# Altium PCB PixelClockPanel.PcbDoc
Units mm, origin at the board's own origin, x right, y up, seen from the top; angles counter-clockwise.
Board outline 202 x 58 mm, 2 copper layers (Component Side, Solder Side), stack 1.57 mm thick; 187 components, 89 nets, 621 pads, 175 vias.
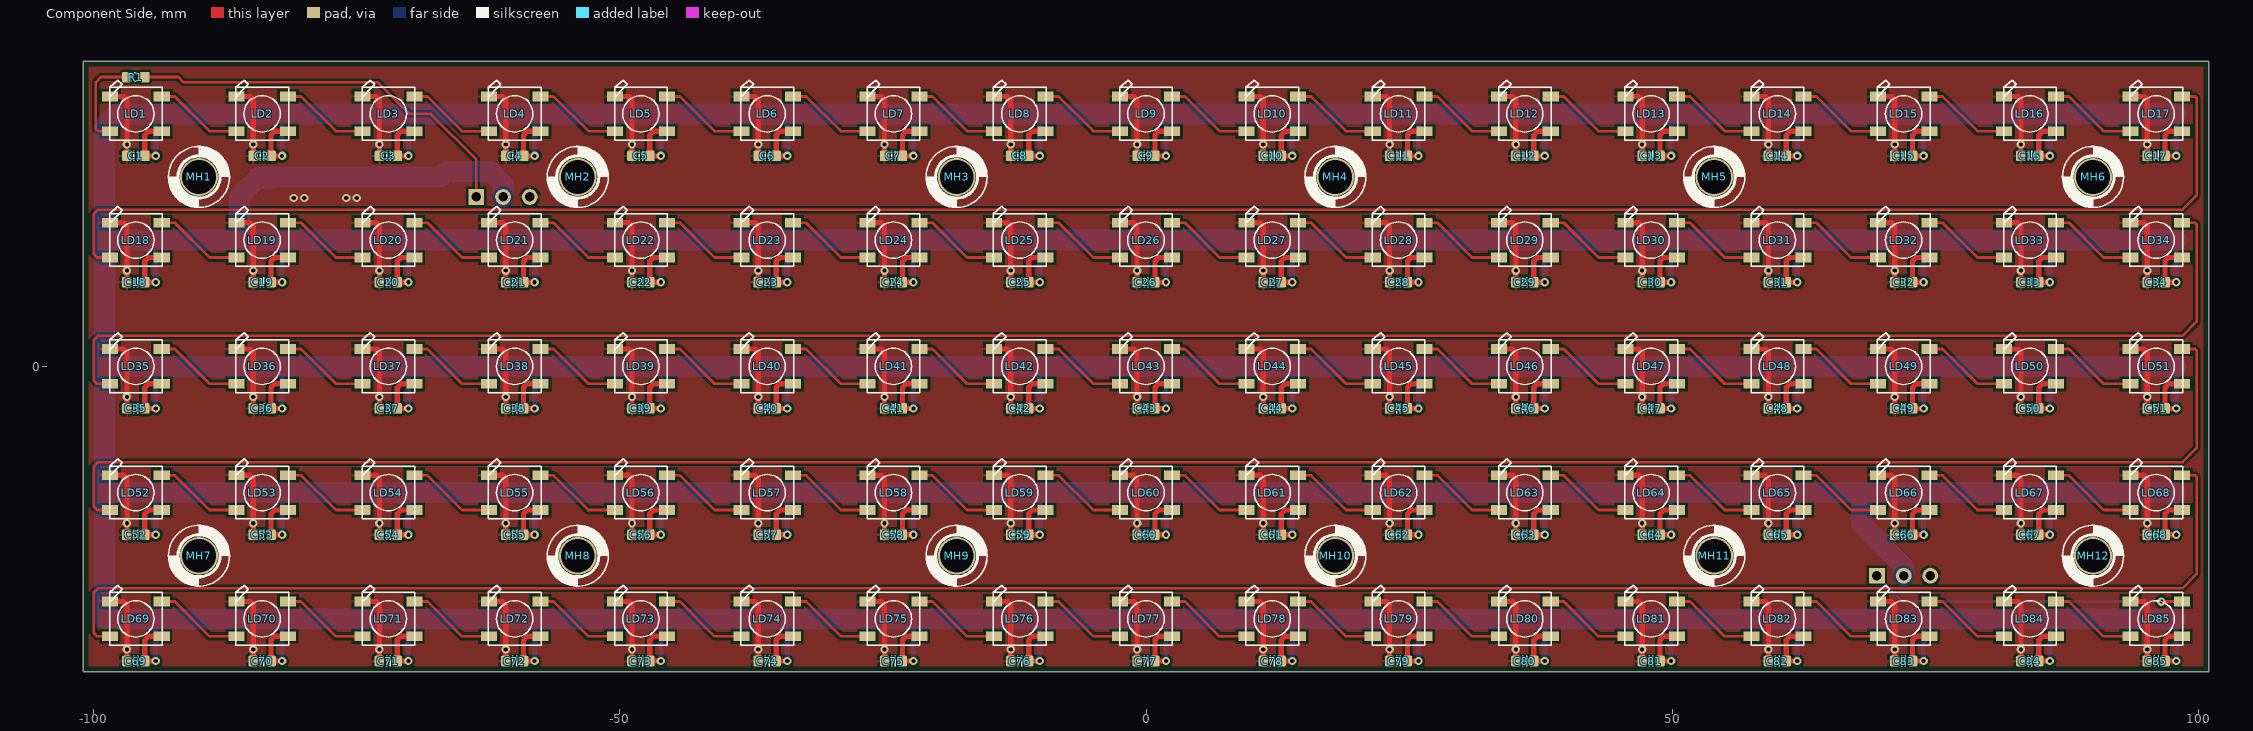
[diagram p0: Component Side view]
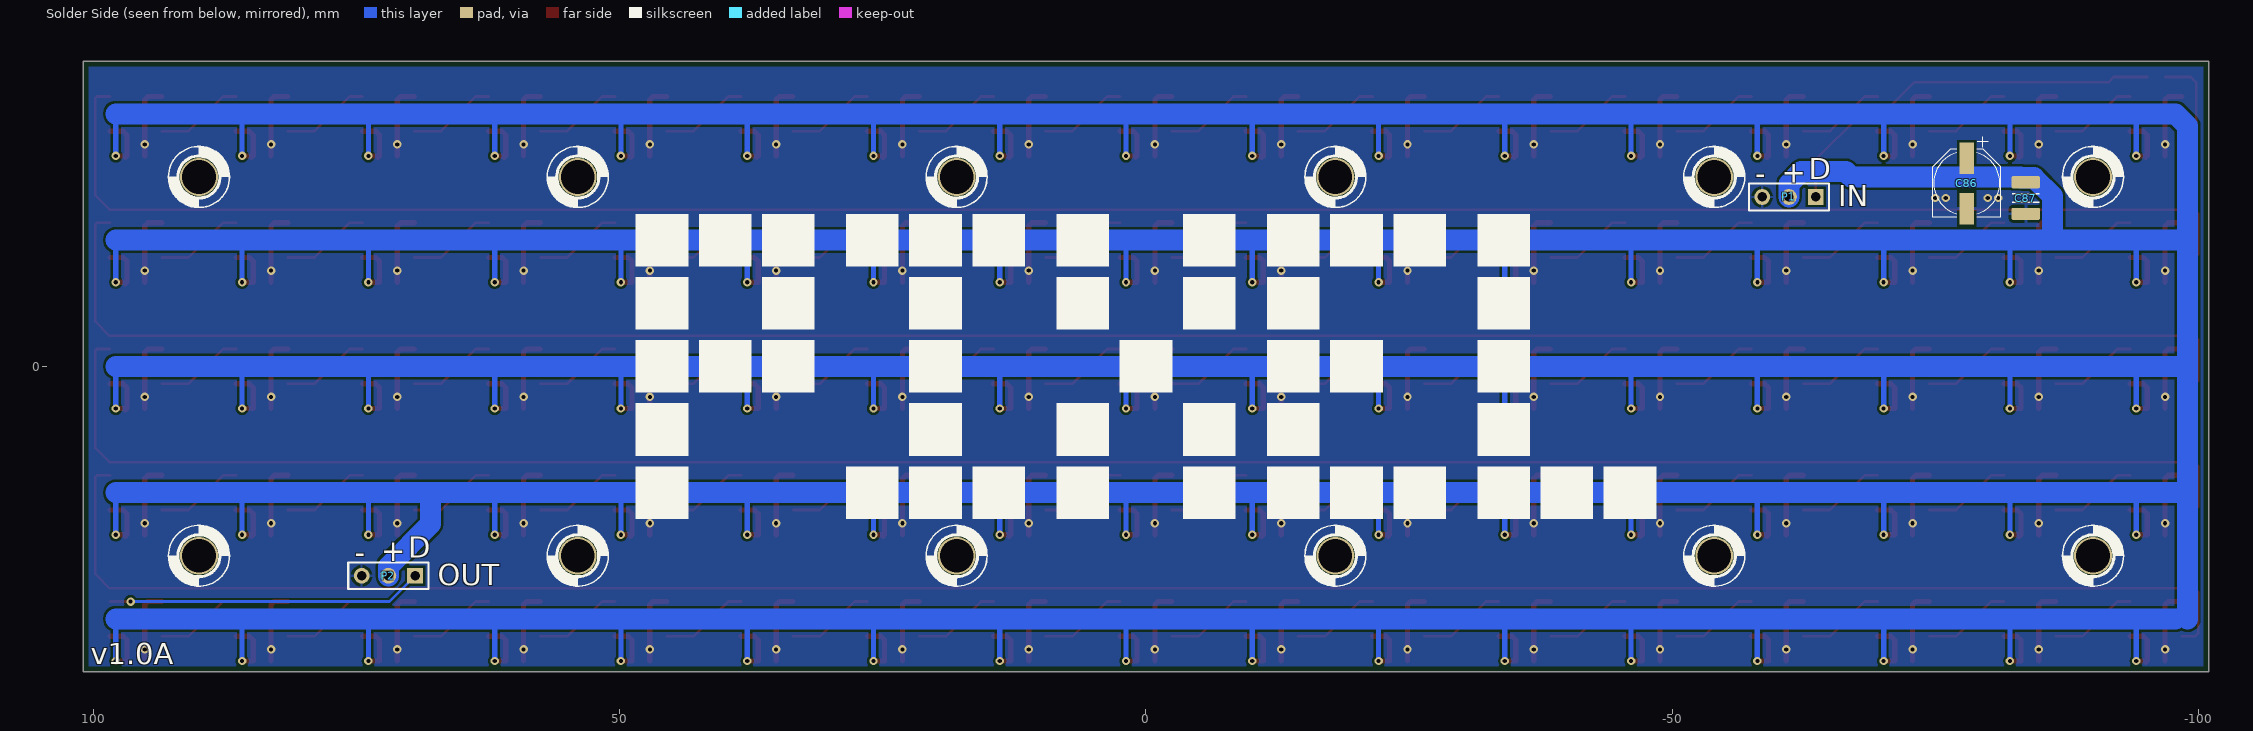
[diagram p1: Solder Side view, seen from below]
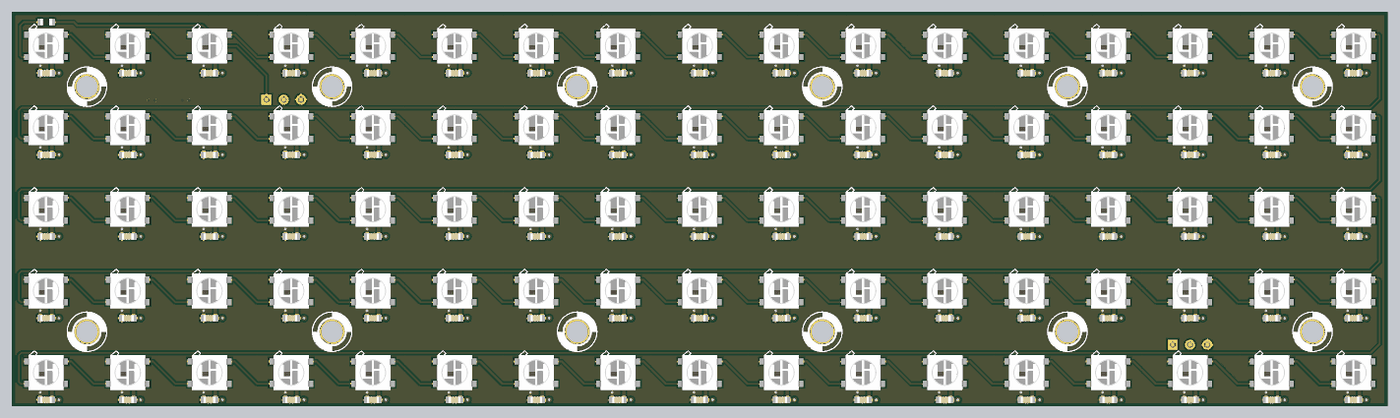
[diagram p2: 3D render of the assembled board from above, using the file's embedded part models]
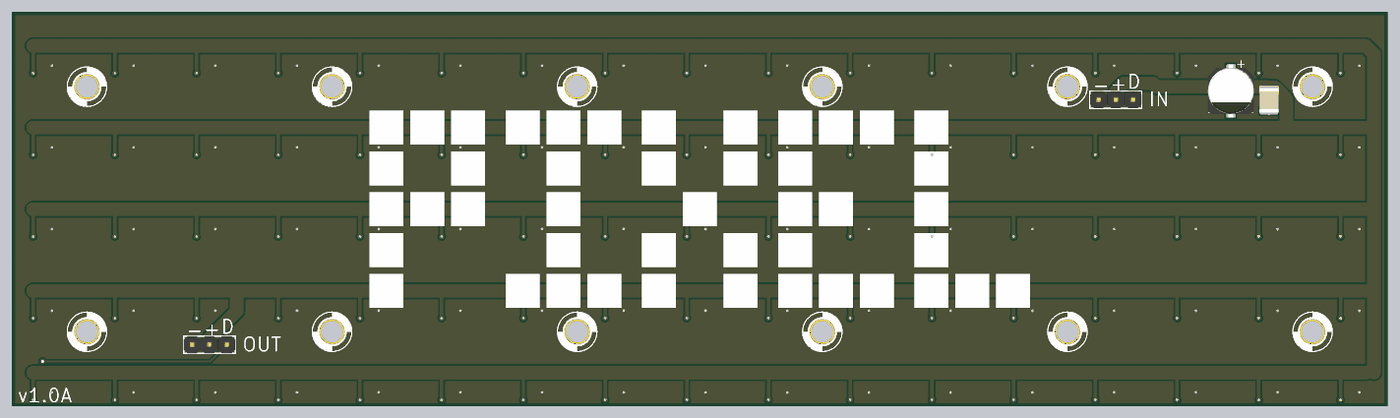
[diagram p3: 3D render of the assembled board from below, using the file's embedded part models]

## Layer stack, top to bottom
Top Solder: solder mask 0.0102, Solder Resist, Dk 3.5
Component Side: signal copper 0.035
Dielectric 3: prepreg 1.5, Dk 4.2
Solder Side: signal copper 0.035
Bottom Solder: solder mask 0.0102, Solder Resist, Dk 3.5

## Board outline
-101,-29 -101,29 101,29 101,-29

## Design rules (kind name [scope] priority, off if disabled: settings)
AssemblyTestPointUsage [All] p1 off:
AssemblyTestpoint [All] p1 off: testpointundercomponent=TRUE minsize=1.016 maxsize=2.54 preferedsize=1.524 minholesize=0 maxholesize=1.016 preferedholesize=0.813 testpointgrid=0.025 usegrid=TRUE gridtolerance=0 allowsidetop=TRUE allowsidebottom=TRUE
BoardOutlineClearance [All] p1: gap=0.254 ignorepadtopadclearanceinfootprint=FALSE except(0.5: Poly-OutlineEdge)
Clearance [All] p1: gap=0.25 ignorepadtopadclearanceinfootprint=FALSE except(0.2: Arc-SMDPad Track-SMDPad SMDPad-SMDPad)
ComponentClearance [All] p1: gap=0.2 collisioncheckmode=3 verticalgap=0.25 showdistances=FALSE
DiffPairsRouting [All] p1: maxlimit=1 minlimit=0.254 mostfreqgap=0.254 toplayer_minwidth=0.2 toplayer_maxwidth=0.4 toplayer_prefwidth=0.254 bottomlayer_minwidth=0.2 bottomlayer_maxwidth=0.4 bottomlayer_prefwidth=0.254 maxuncoupledlength=12.7
FabricationTestPointUsage [All] p1 off: valid=0 allowmultiple=FALSE
FabricationTestpoint [All] p1 off: side=3 testpointundercomponent=TRUE minsize=1.016 maxsize=2.54 preferedsize=1.524 minholesize=0 maxholesize=1.016 preferedholesize=0.813 testpointgrid=0.025 allowsidetop=TRUE allowsidebottom=TRUE usegrid=TRUE gridtolerance=0
HoleSize [All] p1: absolutevalues=TRUE maxlimit=4 minlimit=0.025 maxpercent=80.000 minpercent=20.000
MinimumSolderMaskSliver [All] p1: minsoldermaskwidth=0
NetAntennae [All] p1 off: netantennaetolerance=0
PolygonConnect PolygonConnect_Via [All vs IsVia] p1: connectstyle=Direct reliefconductorwidth=0.254 reliefentries=4 polygonreliefangle="90 Angle" airgapwidth=0.254
PolygonConnect [All] p2: connectstyle=Relief reliefconductorwidth=0.254 reliefentries=4 polygonreliefangle="90 Angle" airgapwidth=0.254
RoutingVias [All] p1: holewidth=0.4 width=0.8 viastyle="Through Hole" minholewidth=0.35 minwidth=0.7 maxholewidth=1 maxwidth=1.5
SilkToSilkClearance [All] p1: silktosilkclearance=0.1
SilkToSolderMaskClearance SilkscreenOverComponentPads [IsPad] p1: minsilkscreentomaskgap=0 clearancetoexposedcopper=TRUE
SolderMaskExpansion [All] p1: expansion=0.102 istentingtop=FALSE
Width Width_1 [All] p1: maxlimit=3 minlimit=0.2 preferedwidth=0.254 minimp=50.000000 maximp=50.000000 favimp=50.000000
19 further rules are at their usual default settings.

## Components (designator, comment, footprint, x,y, rotation, side; value= is the part's Value field where it differs from the comment)
C1 "Capacitor" CAPC1608X90N -96,20 r0 top value=0.1µF
C2 "Capacitor" CAPC1608X90N -84,20 r0 top value=0.1µF
C3 "Capacitor" CAPC1608X90N -72,20 r0 top value=0.1µF
C4 "Capacitor" CAPC1608X90N -60,20 r0 top value=0.1µF
C5 "Capacitor" CAPC1608X90N -48,20 r0 top value=0.1µF
C6 "Capacitor" CAPC1608X90N -36,20 r0 top value=0.1µF
C7 "Capacitor" CAPC1608X90N -24,20 r0 top value=0.1µF
C8 "Capacitor" CAPC1608X90N -12,20 r0 top value=0.1µF
C9 "Capacitor" CAPC1608X90N 0,20 r0 top value=0.1µF
C10 "Capacitor" CAPC1608X90N 12,20 r0 top value=0.1µF
C11 "Capacitor" CAPC1608X90N 24,20 r0 top value=0.1µF
C12 "Capacitor" CAPC1608X90N 36,20 r0 top value=0.1µF
C13 "Capacitor" CAPC1608X90N 48,20 r0 top value=0.1µF
C14 "Capacitor" CAPC1608X90N 60,20 r0 top value=0.1µF
C15 "Capacitor" CAPC1608X90N 72,20 r0 top value=0.1µF
C16 "Capacitor" CAPC1608X90N 84,20 r0 top value=0.1µF
C17 "Capacitor" CAPC1608X90N 96,20 r0 top value=0.1µF
C18 "Capacitor" CAPC1608X90N -96,8 r0 top value=0.1µF
C19 "Capacitor" CAPC1608X90N -84,8 r0 top value=0.1µF
C20 "Capacitor" CAPC1608X90N -72,8 r0 top value=0.1µF
C21 "Capacitor" CAPC1608X90N -60,8 r0 top value=0.1µF
C22 "Capacitor" CAPC1608X90N -48,8 r0 top value=0.1µF
C23 "Capacitor" CAPC1608X90N -36,8 r0 top value=0.1µF
C24 "Capacitor" CAPC1608X90N -24,8 r0 top value=0.1µF
C25 "Capacitor" CAPC1608X90N -12,8 r0 top value=0.1µF
C26 "Capacitor" CAPC1608X90N 0,8 r0 top value=0.1µF
C27 "Capacitor" CAPC1608X90N 12,8 r0 top value=0.1µF
C28 "Capacitor" CAPC1608X90N 24,8 r0 top value=0.1µF
C29 "Capacitor" CAPC1608X90N 36,8 r0 top value=0.1µF
C30 "Capacitor" CAPC1608X90N 48,8 r0 top value=0.1µF
C31 "Capacitor" CAPC1608X90N 60,8 r0 top value=0.1µF
C32 "Capacitor" CAPC1608X90N 72,8 r0 top value=0.1µF
C33 "Capacitor" CAPC1608X90N 84,8 r0 top value=0.1µF
C34 "Capacitor" CAPC1608X90N 96,8 r0 top value=0.1µF
C35 "Capacitor" CAPC1608X90N -96,-4 r0 top value=0.1µF
C36 "Capacitor" CAPC1608X90N -84,-4 r0 top value=0.1µF
C37 "Capacitor" CAPC1608X90N -72,-4 r0 top value=0.1µF
C38 "Capacitor" CAPC1608X90N -60,-4 r0 top value=0.1µF
C39 "Capacitor" CAPC1608X90N -48,-4 r0 top value=0.1µF
C40 "Capacitor" CAPC1608X90N -36,-4 r0 top value=0.1µF
C41 "Capacitor" CAPC1608X90N -24,-4 r0 top value=0.1µF
C42 "Capacitor" CAPC1608X90N -12,-4 r0 top value=0.1µF
C43 "Capacitor" CAPC1608X90N 0,-4 r0 top value=0.1µF
C44 "Capacitor" CAPC1608X90N 12,-4 r0 top value=0.1µF
C45 "Capacitor" CAPC1608X90N 24,-4 r0 top value=0.1µF
C46 "Capacitor" CAPC1608X90N 36,-4 r0 top value=0.1µF
C47 "Capacitor" CAPC1608X90N 48,-4 r0 top value=0.1µF
C48 "Capacitor" CAPC1608X90N 60,-4 r0 top value=0.1µF
C49 "Capacitor" CAPC1608X90N 72,-4 r0 top value=0.1µF
C50 "Capacitor" CAPC1608X90N 84,-4 r0 top value=0.1µF
C51 "Capacitor" CAPC1608X90N 96,-4 r0 top value=0.1µF
C52 "Capacitor" CAPC1608X90N -96,-16 r0 top value=0.1µF
C53 "Capacitor" CAPC1608X90N -84,-16 r0 top value=0.1µF
C54 "Capacitor" CAPC1608X90N -72,-16 r0 top value=0.1µF
C55 "Capacitor" CAPC1608X90N -60,-16 r0 top value=0.1µF
C56 "Capacitor" CAPC1608X90N -48,-16 r0 top value=0.1µF
C57 "Capacitor" CAPC1608X90N -36,-16 r0 top value=0.1µF
C58 "Capacitor" CAPC1608X90N -24,-16 r0 top value=0.1µF
C59 "Capacitor" CAPC1608X90N -12,-16 r0 top value=0.1µF
C60 "Capacitor" CAPC1608X90N 0,-16 r0 top value=0.1µF
C61 "Capacitor" CAPC1608X90N 12,-16 r0 top value=0.1µF
C62 "Capacitor" CAPC1608X90N 24,-16 r0 top value=0.1µF
C63 "Capacitor" CAPC1608X90N 36,-16 r0 top value=0.1µF
C64 "Capacitor" CAPC1608X90N 48,-16 r0 top value=0.1µF
C65 "Capacitor" CAPC1608X90N 60,-16 r0 top value=0.1µF
C66 "Capacitor" CAPC1608X90N 72,-16 r0 top value=0.1µF
C67 "Capacitor" CAPC1608X90N 84,-16 r0 top value=0.1µF
C68 "Capacitor" CAPC1608X90N 96,-16 r0 top value=0.1µF
C69 "Capacitor" CAPC1608X90N -96,-28 r0 top value=0.1µF
C70 "Capacitor" CAPC1608X90N -84,-28 r0 top value=0.1µF
C71 "Capacitor" CAPC1608X90N -72,-28 r0 top value=0.1µF
C72 "Capacitor" CAPC1608X90N -60,-28 r0 top value=0.1µF
C73 "Capacitor" CAPC1608X90N -48,-28 r0 top value=0.1µF
C74 "Capacitor" CAPC1608X90N -36,-28 r0 top value=0.1µF
C75 "Capacitor" CAPC1608X90N -24,-28 r0 top value=0.1µF
C76 "Capacitor" CAPC1608X90N -12,-28 r0 top value=0.1µF
C77 "Capacitor" CAPC1608X90N 0,-28 r0 top value=0.1µF
C78 "Capacitor" CAPC1608X90N 12,-28 r0 top value=0.1µF
C79 "Capacitor" CAPC1608X90N 24,-28 r0 top value=0.1µF
C80 "Capacitor" CAPC1608X90N 36,-28 r0 top value=0.1µF
C81 "Capacitor" CAPC1608X90N 48,-28 r0 top value=0.1µF
C82 "Capacitor" CAPC1608X90N 60,-28 r0 top value=0.1µF
C83 "Capacitor" CAPC1608X90N 72,-28 r0 top value=0.1µF
C84 "Capacitor" CAPC1608X90N 84,-28 r0 top value=0.1µF
C85 "Capacitor" CAPC1608X90N 96,-28 r0 top value=0.1µF
C86 "CapE-6.3-100uF-16V" "CAP EL PANASONIC" -78,14.95 r180 bottom value="100uF 16V"
C87 "CapC-1210-22uF-16V" "CAP 3225-1210" -83.6,16 r90 bottom value=22uF
LD1 "SK6812" WS2812B -96,24 r0 top
LD2 "SK6812" WS2812B -84,24 r0 top
LD3 "SK6812" WS2812B -72,24 r0 top
LD4 "SK6812" WS2812B -60,24 r0 top
LD5 "SK6812" WS2812B -48,24 r0 top
LD6 "SK6812" WS2812B -36,24 r0 top
LD7 "SK6812" WS2812B -24,24 r0 top
LD8 "SK6812" WS2812B -12,24 r0 top
LD9 "SK6812" WS2812B 0,24 r0 top
LD10 "SK6812" WS2812B 12,24 r0 top
LD11 "SK6812" WS2812B 24,24 r0 top
LD12 "SK6812" WS2812B 36,24 r0 top
LD13 "SK6812" WS2812B 48,24 r0 top
LD14 "SK6812" WS2812B 60,24 r0 top
LD15 "SK6812" WS2812B 72,24 r0 top
LD16 "SK6812" WS2812B 84,24 r0 top
LD17 "SK6812" WS2812B 96,24 r0 top
LD18 "SK6812" WS2812B -96,12 r0 top
LD19 "SK6812" WS2812B -84,12 r0 top
LD20 "SK6812" WS2812B -72,12 r0 top
LD21 "SK6812" WS2812B -60,12 r0 top
LD22 "SK6812" WS2812B -48,12 r0 top
LD23 "SK6812" WS2812B -36,12 r0 top
LD24 "SK6812" WS2812B -24,12 r0 top
LD25 "SK6812" WS2812B -12,12 r0 top
LD26 "SK6812" WS2812B 0,12 r0 top
LD27 "SK6812" WS2812B 12,12 r0 top
LD28 "SK6812" WS2812B 24,12 r0 top
LD29 "SK6812" WS2812B 36,12 r0 top
LD30 "SK6812" WS2812B 48,12 r0 top
LD31 "SK6812" WS2812B 60,12 r0 top
LD32 "SK6812" WS2812B 72,12 r0 top
LD33 "SK6812" WS2812B 84,12 r0 top
LD34 "SK6812" WS2812B 96,12 r0 top
LD35 "SK6812" WS2812B -96,0 r0 top
LD36 "SK6812" WS2812B -84,0 r0 top
LD37 "SK6812" WS2812B -72,0 r0 top
LD38 "SK6812" WS2812B -60,0 r0 top
LD39 "SK6812" WS2812B -48,0 r0 top
LD40 "SK6812" WS2812B -36,0 r0 top
LD41 "SK6812" WS2812B -24,0 r0 top
LD42 "SK6812" WS2812B -12,0 r0 top
LD43 "SK6812" WS2812B 0,0 r0 top
LD44 "SK6812" WS2812B 12,0 r0 top
LD45 "SK6812" WS2812B 24,0 r0 top
LD46 "SK6812" WS2812B 36,0 r0 top
LD47 "SK6812" WS2812B 48,0 r0 top
LD48 "SK6812" WS2812B 60,0 r0 top
LD49 "SK6812" WS2812B 72,0 r0 top
LD50 "SK6812" WS2812B 84,0 r0 top
LD51 "SK6812" WS2812B 96,0 r0 top
LD52 "SK6812" WS2812B -96,-12 r0 top
LD53 "SK6812" WS2812B -84,-12 r0 top
LD54 "SK6812" WS2812B -72,-12 r0 top
LD55 "SK6812" WS2812B -60,-12 r0 top
LD56 "SK6812" WS2812B -48,-12 r0 top
LD57 "SK6812" WS2812B -36,-12 r0 top
LD58 "SK6812" WS2812B -24,-12 r0 top
LD59 "SK6812" WS2812B -12,-12 r0 top
LD60 "SK6812" WS2812B 0,-12 r0 top
LD61 "SK6812" WS2812B 12,-12 r0 top
LD62 "SK6812" WS2812B 24,-12 r0 top
LD63 "SK6812" WS2812B 36,-12 r0 top
LD64 "SK6812" WS2812B 48,-12 r0 top
LD65 "SK6812" WS2812B 60,-12 r0 top
LD66 "SK6812" WS2812B 72,-12 r0 top
LD67 "SK6812" WS2812B 84,-12 r0 top
LD68 "SK6812" WS2812B 96,-12 r0 top
LD69 "SK6812" WS2812B -96,-24 r0 top
LD70 "SK6812" WS2812B -84,-24 r0 top
LD71 "SK6812" WS2812B -72,-24 r0 top
LD72 "SK6812" WS2812B -60,-24 r0 top
LD73 "SK6812" WS2812B -48,-24 r0 top
LD74 "SK6812" WS2812B -36,-24 r0 top
LD75 "SK6812" WS2812B -24,-24 r0 top
LD76 "SK6812" WS2812B -12,-24 r0 top
LD77 "SK6812" WS2812B 0,-24 r0 top
LD78 "SK6812" WS2812B 12,-24 r0 top
LD79 "SK6812" WS2812B 24,-24 r0 top
LD80 "SK6812" WS2812B 36,-24 r0 top
LD81 "SK6812" WS2812B 48,-24 r0 top
LD82 "SK6812" WS2812B 60,-24 r0 top
LD83 "SK6812" WS2812B 72,-24 r0 top
LD84 "SK6812" WS2812B 84,-24 r0 top
LD85 "SK6812" WS2812B 96,-24 r0 top
MH1 "Screw Hole" M3-Hole-2 -90,18 r0 top
MH2 "Screw Hole" M3-Hole-2 -54,18 r0 top
MH3 "Screw Hole" M3-Hole-2 -18,18 r0 top
MH4 "Screw Hole" M3-Hole-2 18,18 r0 top
MH5 "Screw Hole" M3-Hole-2 54,18 r0 top
MH6 "Screw Hole" M3-Hole-2 90,18 r0 top
MH7 "Screw Hole" M3-Hole-2 -90,-18 r0 top
MH8 "Screw Hole" M3-Hole-2 -54,-18 r0 top
MH9 "Screw Hole" M3-Hole-2 -18,-18 r0 top
MH10 "Screw Hole" M3-Hole-2 18,-18 r0 top
MH11 "Screw Hole" M3-Hole-2 54,-18 r0 top
MH12 "Screw Hole" M3-Hole-2 90,-18 r0 top
P1 "Header 3" HDR1X3-HEADER -63.64,16.1 r0 bottom
P2 "Header 3" HDR1X3-HEADER 69.46,-19.9 r0 bottom
R1 "Resistor" "RES 1608-0603" -96,27.5 r180 top value=470R

## Footprints (in the part's own frame and the unit in brackets; to place one, negate y for a bottom-side part, rotate by r counter-clockwise, add the part's x,y. Pads: shape width x height; smd on the part's side, far side on the other; paste and mask are expansions set on the pad)
"CAP 3225-1210" [mm] "Chip Capacitor, Body 3.2x2.5mm, EIA 1210, IPC Medium Density"
  round 0.508 on Mech15: 0(0,0)
  rrect25% 1.15x2.7 smd: 1(-1.5,0) 2(1.5,0)
  silkscreen extent -0.4,-1.3 0.4,1.3, body extent -1.8,-1.4 1.8,1.4, height 2.19
"CAP EL PANASONIC" [mil]
  rect 55x118 smd: 1(0,190.97) 2(0,1.97)
  silkscreen extent -128,-31 127,271, body extent -134,-57 134,250, height 217
CAPC1608X90N [mm] "Chip Capacitor, Body 1.6x0.8mm, EIA 0603, IPC Medium Density"
  round 0.254 on Mech15: 0(0,0)
  rrect25% 0.9x1 smd: 1(-0.85,0) 2(0.85,0)
  Component Side pour cut-out: -0.6,0.5 -0.4,0.7 0.4,0.7 0.6,0.5 0.6,-0.5 0.4,-0.7 -0.4,-0.7 -0.6,-0.5
  silkscreen extent -0.18,-0.48 0.18,0.48, body extent -0.85,-0.45 0.85,0.45, height 0.89
HDR1X3-HEADER [mm]
  rect 1.5x1.5 hole 0.9: 1(0,0)
  round 1.5 hole 0.9: 2(2.54,0) 3(5.08,0)
  silkscreen extent -1.27,-1.27 6.35,1.27, body extent -1.27,-1.27 6.35,1.27, height 8.6
M3-Hole-2 [mm]
  round 3.6 hole 3.2: M3(0,0)
  silkscreen extent -2.9,-2.93 2.9,2.93
"RES 1608-0603" [mm]
  round 0.254 on Mech15: 0(0,0)
  rrect25% 0.9x1 smd: 1(-0.85,0) 2(0.85,0)
  Component Side pour cut-out: -0.6,0.5 -0.4,0.7 0.4,0.7 0.6,0.5 0.6,-0.5 0.4,-0.7 -0.4,-0.7 -0.6,-0.5
  silkscreen extent -0.15,-0.41 0.15,0.41, body extent -0.87,-0.47 0.88,0.48, height 0.54
WS2812B [mil]
  rect 60x36 smd: 1(97,-64.96) 2(97,65) 3(-96.46,65) 4(-96.46,-64.96)
  silkscreen extent -98,-98 99,126, body extent -105,-97 105,97, height 59

## Part data
C1 C2 C3 C4 C5 C6 C7 C8 C9 C10 C11 C12 C13 C14 C15 C16 C17 C18 C19 C20 C21 C22 C23 C24 C25 C26 C27 C28 C29 C30 C31 C32 C33 C34 C35 C36 C37 C38 C39 C40 C41 C42 C43 C44 C45 C46 C47 C48 C49 C50 C51 C52 C53 C54 C55 C56 C57 C58 C59 C60 C61 C62 C63 C64 C65 C66 C67 C68 C69 C70 C71 C72 C73 C74 C75 C76 C77 C78 C79 C80 C81 C82 C83 C84 C85: library part UMJ107BB7104KAHT, "CAP CER 0.1UF 50V X7R 0603", Manufacturer 1="Taiyo Yuden", Operating Temperature="-55°C ~ 125°C", Package=0402, Package / Case="0603 (1608 Metric)", Supplier Part Number 1=587-4474-1-ND, Temperature Coefficient=X7R, TOLERANCE=±10%, Voltage=50V, Manufacturer Part Number 1=UMJ107BB7104KAHT, Note="Approved sub OK", Revision="July-2002: Re-released for DXP Platform.", Size / Dimension="0.063\" L x 0.031\" W (1.60mm x 0.80mm)", Supplier 1=Digi-Key, Thickness (Max)="0.039\" (1.00mm)", Type=X5R
C86: "Polarized Capacitor (Surface Mount)", Supplier Part Number 1=565-2204-1-ND, Note="Approved sub OK", Published=8-Jun-2000, Publisher="Altium Limited", Revision="July-2002: Re-released for DXP Platform.", Supplier 1=Digi-Key
C87: "CAP CER 22UF 16V X7R 1210", Package=1210, Supplier Part Number 1=587-2784-1-ND, TOLERANCE=10%, Voltage=25V, Note="Approved sub OK", Revision="July-2002: Re-released for DXP Platform.", Supplier 1=Digi-Key, Type=X7R
LD1 LD2 LD3 LD4 LD5 LD6 LD7 LD8 LD9 LD10 LD11 LD12 LD13 LD14 LD15 LD16 LD17 LD18 LD19 LD20 LD21 LD22 LD23 LD24 LD25 LD26 LD27 LD28 LD29 LD30 LD31 LD32 LD33 LD34 LD35 LD36 LD37 LD38 LD39 LD40 LD41 LD42 LD43 LD44 LD45 LD46 LD47 LD48 LD49 LD50 LD51 LD52 LD53 LD54 LD55 LD56 LD57 LD58 LD59 LD60 LD61 LD62 LD63 LD64 LD65 LD66 LD67 LD68 LD69 LD70 LD71 LD72 LD73 LD74 LD75 LD76 LD77 LD78 LD79 LD80 LD81 LD82 LD83 LD84 LD85: library part "LED - SK6812"
P1 P2: library part "Header 1X3", "Header, 3-Pin", Manufacturer 1="Generic Header", Note="Approved sub OK"
R1: library part RC0603FR-07470RL, "RES SMD 470 OHM 1% 1/10W 0603", Manufacturer 1=Yageo, Operating Temperature="-55°C ~ 155°C", Package / Case="0603 (1608 Metric)", Power (Watts)="0.1W, 1/10W", Supplier Part Number 1=311-470HRCT-ND, Temperature Coefficient=±100ppm/°C, TOLERANCE=±1%, Composition="Thick Film", Features="Moisture Resistant", Height - Seated (Max)="0.022\" (0.55mm)", Manufacturer Part Number 1=RC0603FR-07470RL, Note="Approved sub OK", Published=8-Jun-2000, Publisher="Altium Limited", Revision="July-2002: Re-released for DXP Platform.", Size / Dimension="0.063\" L x 0.031\" W (1.60mm x 0.80mm)", Supplier 1=Digi-Key

## Via types
v1: diameter 0.8, hole 0.4, Component Side to Solder Side, tented both sides, 175 vias

## Nets (pads, with @x,y where several pads share a name; then routed paths per layer and width w, separated by ;. In a path a pad name is that pad's centre, name@x,y a point inside that pad or via, vN(x,y) a via of type N, cw(c..) or ccw(c..) an arc to the next point about the centre after c; other vN are vias at no path point)
+5V: C1.2 C2.2 C3.2 C4.2 C5.2 C6.2 C7.2 C8.2 C9.2 C10.2 C11.2 C12.2 C13.2 C14.2 C15.2 C16.2 C17.2 C18.2 C19.2 C20.2 C21.2 C22.2 C23.2 C24.2 C25.2 C26.2 C27.2 C28.2 C29.2 C30.2 C31.2 C32.2 C33.2 C34.2 C35.2 C36.2 C37.2 C38.2 C39.2 C40.2 C41.2 C42.2 C43.2 C44.2 C45.2 C46.2 C47.2 C48.2 C49.2 C50.2 C51.2 C52.2 C53.2 C54.2 C55.2 C56.2 C57.2 C58.2 C59.2 C60.2 C61.2 C62.2 C63.2 C64.2 C65.2 C66.2 C67.2 C68.2 C69.2 C70.2 C71.2 C72.2 C73.2 C74.2 C75.2 C76.2 C77.2 C78.2 C79.2 C80.2 C81.2 C82.2 C83.2 C84.2 C85.2 C86.1 C87.2 LD1.1 LD2.1 LD3.1 LD4.1 LD5.1 LD6.1 LD7.1 LD8.1 LD9.1 LD10.1 LD11.1 LD12.1 LD13.1 LD14.1 LD15.1 LD16.1 LD17.1 LD18.1 LD19.1 LD20.1 LD21.1 LD22.1 LD23.1 LD24.1 LD25.1 LD26.1 LD27.1 LD28.1 LD29.1 LD30.1 LD31.1 LD32.1 LD33.1 LD34.1 LD35.1 LD36.1 LD37.1 LD38.1 LD39.1 LD40.1 LD41.1 LD42.1 LD43.1 LD44.1 LD45.1 LD46.1 LD47.1 LD48.1 LD49.1 LD50.1 LD51.1 LD52.1 LD53.1 LD54.1 LD55.1 LD56.1 LD57.1 LD58.1 LD59.1 LD60.1 LD61.1 LD62.1 LD63.1 LD64.1 LD65.1 LD66.1 LD67.1 LD68.1 LD69.1 LD70.1 LD71.1 LD72.1 LD73.1 LD74.1 LD75.1 LD76.1 LD77.1 LD78.1 LD79.1 LD80.1 LD81.1 LD82.1 LD83.1 LD84.1 LD85.1 P1.2 P2.2 | length 1815.7
  Component Side w0.5: C69.2@-95,-28.15 C69.2 ; C1.2@-95,19.85 C1.2 ; v1(-94.1,-28) C69.2 ; v1(-94.1,-16) C52.2 -95.15,-14 -94.8,-13.65 LD52.1 ; v1(-94.1,-4) C35.2 -95.15,-2 -94.8,-1.65 LD35.1 ; v1(-94.1,8) C18.2 -95.15,10 -94.8,10.35 LD18.1 ; v1(-94.1,20) C1.2 ; LD69.1 -94.8,-25.65 -95.15,-26 C69.2 ; LD1.1 -94.8,22.35 -95.15,22 C1.2 ; C53.2@-83,-16.15 C53.2 ; C2.2@-83,19.85 C2.2 ; v1(-82.1,-28) C70.2 -83.15,-26 -82.8,-25.65 LD70.1 ; v1(-82.1,-16) C53.2 ; v1(-82.1,-4) C36.2 -83.15,-2 -82.8,-1.65 LD36.1 ; v1(-82.1,8) C19.2 -83.15,10 -82.8,10.35 LD19.1 ; v1(-82.1,20) C2.2 ; LD53.1 -82.8,-13.65 -83.15,-14 C53.2 ; LD2.1 -82.8,22.35 -83.15,22 C2.2 ; C3.2@-71,19.85 C3.2 ; v1(-70.1,-28) C71.2 -71.15,-26 -70.8,-25.65 LD71.1 ; v1(-70.1,-16) C54.2 -71.15,-14 -70.8,-13.65 LD54.1 ; v1(-70.1,-4) C37.2 -71.15,-2 -70.8,-1.65 LD37.1 ; v1(-70.1,8) C20.2 -71.15,10 -70.8,10.35 LD20.1 ; v1(-70.1,20) C3.2 ; LD3.1 -70.8,22.35 -71.15,22 C3.2 ; C55.2@-59,-16.15 C55.2 ; C4.2@-59,19.85 C4.2 ; v1(-58.1,-28) C72.2 -59.15,-26 -58.8,-25.65 LD72.1 ; v1(-58.1,-16) C55.2 ; v1(-58.1,-4) C38.2 -59.15,-2 -58.8,-1.65 LD38.1 ; v1(-58.1,8) C21.2 -59.15,10 -58.8,10.35 LD21.1 ; v1(-58.1,20) C4.2 ; LD55.1 -58.8,-13.65 -59.15,-14 C55.2 ; LD4.1 -58.8,22.35 -59.15,22 C4.2 ; C56.2@-47,-16.15 C56.2 ; C5.2@-47,19.85 C5.2 ; v1(-46.1,-28) C73.2 -47.15,-26 -46.8,-25.65 LD73.1 ; v1(-46.1,-16) C56.2 ; v1(-46.1,-4) C39.2 -47.15,-2 -46.8,-1.65 LD39.1 ; v1(-46.1,8) C22.2 -47.15,10 -46.8,10.35 LD22.1 ; v1(-46.1,20) C5.2 ; LD56.1 -46.8,-13.65 -47.15,-14 C56.2 ; LD5.1 -46.8,22.35 -47.15,22 C5.2 ; C6.2@-35,19.85 C6.2 ; v1(-34.1,-28) C74.2 -35.15,-26 -34.8,-25.65 LD74.1 ; v1(-34.1,-16) C57.2 -35.15,-14 -34.8,-13.65 LD57.1 ; v1(-34.1,-4) C40.2 -35.15,-2 -34.8,-1.65 LD40.1 ; v1(-34.1,8) C23.2 -35.15,10 -34.8,10.35 LD23.1 ; v1(-34.1,20) C6.2 ; LD6.1 -34.8,22.35 -35.15,22 C6.2 ; C58.2@-23,-16.15 C58.2 ; C7.2@-23,19.85 C7.2 ; v1(-22.1,-28) C75.2 -23.15,-26 -22.8,-25.65 LD75.1 ; v1(-22.1,-16) C58.2 ; v1(-22.1,-4) C41.2 -23.15,-2 -22.8,-1.65 LD41.1 ; v1(-22.1,8) C24.2 -23.15,10 -22.8,10.35 LD24.1 ; v1(-22.1,20) C7.2 ; LD58.1 -22.8,-13.65 -23.15,-14 C58.2 ; LD7.1 -22.8,22.35 -23.15,22 C7.2 ; C59.2@-11,-16.15 C59.2 ; C8.2@-11,19.85 C8.2 ; v1(-10.1,-28) C76.2 -11.15,-26 -10.8,-25.65 LD76.1 ; v1(-10.1,-16) C59.2 ; v1(-10.1,-4) C42.2 -11.15,-2 -10.8,-1.65 LD42.1 ; v1(-10.1,8) C25.2 -11.15,10 -10.8,10.35 LD25.1 ; v1(-10.1,20) C8.2 ; LD59.1 -10.8,-13.65 -11.15,-14 C59.2 ; LD8.1 -10.8,22.35 -11.15,22 C8.2 ; C9.2@1,19.85 C9.2 ; v1(1.9,-28) C77.2 0.85,-26 1.2,-25.65 LD77.1 ; v1(1.9,-16) C60.2 0.85,-14 1.2,-13.65 LD60.1 ; v1(1.9,-4) C43.2 0.85,-2 1.2,-1.65 LD43.1 ; v1(1.9,8) C26.2 0.85,10 1.2,10.35 LD26.1 ; v1(1.9,20) C9.2 ; LD9.1 1.2,22.35 0.85,22 C9.2 ; C61.2@13,-16.15 C61.2 ; C10.2@13,19.85 C10.2 ; v1(13.9,-28) C78.2 12.85,-26 13.2,-25.65 LD78.1 ; v1(13.9,-16) C61.2 ; v1(13.9,-4) C44.2 12.85,-2 13.2,-1.65 LD44.1 ; v1(13.9,8) C27.2 12.85,10 13.2,10.35 LD27.1 ; v1(13.9,20) C10.2 ; LD61.1 13.2,-13.65 12.85,-14 C61.2 ; LD10.1 13.2,22.35 12.85,22 C10.2 ; C62.2@25,-16.15 C62.2 ; C11.2@25,19.85 C11.2 ; v1(25.9,-28) C79.2 24.85,-26 25.2,-25.65 LD79.1 ; v1(25.9,-16) C62.2 ; v1(25.9,-4) C45.2 24.85,-2 25.2,-1.65 LD45.1 ; v1(25.9,8) C28.2 24.85,10 25.2,10.35 LD28.1 ; v1(25.9,20) C11.2 ; LD62.1 25.2,-13.65 24.85,-14 C62.2 ; LD11.1 25.2,22.35 24.85,22 C11.2 ; C12.2@37,19.85 C12.2 ; v1(37.9,-28) C80.2 36.85,-26 37.2,-25.65 LD80.1 ; v1(37.9,-16) C63.2 36.85,-14 37.2,-13.65 LD63.1 ; v1(37.9,-4) C46.2 36.85,-2 37.2,-1.65 LD46.1 ; v1(37.9,8) C29.2 36.85,10 37.2,10.35 LD29.1 ; v1(37.9,20) C12.2 ; LD12.1 37.2,22.35 36.85,22 C12.2 ; C64.2@49,-16.15 C64.2 ; C13.2@49,19.85 C13.2 ; v1(49.9,-28) C81.2 48.85,-26 49.2,-25.65 LD81.1 ; v1(49.9,-16) C64.2 ; v1(49.9,-4) C47.2 48.85,-2 49.2,-1.65 LD47.1 ; v1(49.9,8) C30.2 48.85,10 49.2,10.35 LD30.1 ; v1(49.9,20) C13.2 ; LD64.1 49.2,-13.65 48.85,-14 C64.2 ; LD13.1 49.2,22.35 48.85,22 C13.2 ; C65.2@61,-16.15 C65.2 ; C14.2@61,19.85 C14.2 ; v1(61.9,-28) C82.2 60.85,-26 61.2,-25.65 LD82.1 ; v1(61.9,-16) C65.2 ; v1(61.9,-4) C48.2 60.85,-2 61.2,-1.65 LD48.1 ; v1(61.9,8) C31.2 60.85,10 61.2,10.35 LD31.1 ; v1(61.9,20) C14.2 ; LD65.1 61.2,-13.65 60.85,-14 C65.2 ; LD14.1 61.2,22.35 60.85,22 C14.2 ; C15.2@73,19.85 C15.2 ; v1(73.9,-28) C83.2 72.85,-26 73.2,-25.65 LD83.1 ; v1(73.9,-16) C66.2 72.85,-14 73.2,-13.65 LD66.1 ; v1(73.9,-4) C49.2 72.85,-2 73.2,-1.65 LD49.1 ; v1(73.9,8) C32.2 72.85,10 73.2,10.35 LD32.1 ; v1(73.9,20) C15.2 ; LD15.1 73.2,22.35 72.85,22 C15.2 ; C67.2@85,-16.15 C67.2 ; C16.2@85,19.85 C16.2 ; v1(85.9,-28) C84.2 84.85,-26 85.2,-25.65 LD84.1 ; v1(85.9,-16) C67.2 ; v1(85.9,-4) C50.2 84.85,-2 85.2,-1.65 LD50.1 ; v1(85.9,8) C33.2 84.85,10 85.2,10.35 LD33.1 ; v1(85.9,20) C16.2 ; LD67.1 85.2,-13.65 84.85,-14 C67.2 ; LD16.1 85.2,22.35 84.85,22 C16.2 ; C85.2@97,-28.15 C85.2 ; C68.2@97,-16.15 C68.2 ; C51.2@97,-4.15 C51.2 ; C34.2@97,7.85 C34.2 ; C17.2@97,19.85 C17.2 ; v1(97.9,-28) C85.2 ; v1(97.9,-16) C68.2 ; v1(97.9,-4) C51.2 ; v1(97.9,8) C34.2 ; v1(97.9,20) C17.2 ; LD85.1 97.2,-25.65 96.85,-26 C85.2 ; LD68.1 97.2,-13.65 96.85,-14 C68.2 ; LD51.1 97.2,-1.65 96.85,-2 C51.2 ; LD34.1 97.2,10.35 96.85,10 C34.2 ; LD17.1 97.2,22.35 96.85,22 C17.2
  Solder Side w0.5: v1(-94.1,-28) -94.1,-24.1 ; v1(-94.1,-16) -94.1,-12.1 ; v1(-94.1,-4) -94.1,-0.1 ; v1(-94.1,8) -94.1,11.9 ; v1(-94.1,20) -94.1,23.9 ; v1(-82.1,-28) -82.1,-24.1 ; v1(-82.1,-16) -82.1,-12.1 ; v1(-82.1,-4) -82.1,-0.1 ; v1(-82.1,8) -82.1,11.9 ; v1(-82.1,20) -82.1,23.9 ; v1(-70.1,-28) -70.1,-24.1 ; v1(-70.1,-16) -70.1,-12.1 ; v1(-70.1,-4) -70.1,-0.1 ; v1(-70.1,8) -70.1,11.9 ; v1(-70.1,20) -70.1,23.9 ; v1(-58.1,-28) -58.1,-24.1 ; v1(-58.1,-16) -58.1,-12.1 ; v1(-58.1,-4) -58.1,-0.1 ; v1(-58.1,8) -58.1,11.9 ; v1(-58.1,20) -58.1,23.9 ; v1(-46.1,-28) -46.1,-24.1 ; v1(-46.1,-16) -46.1,-12.1 ; v1(-46.1,-4) -46.1,-0.1 ; v1(-46.1,8) -46.1,11.9 ; v1(-46.1,20) -46.1,23.9 ; v1(-34.1,-28) -34.1,-24.1 ; v1(-34.1,-16) -34.1,-12.1 ; v1(-34.1,-4) -34.1,-0.1 ; v1(-34.1,8) -34.1,11.9 ; v1(-34.1,20) -34.1,23.9 ; v1(-22.1,-28) -22.1,-24.1 ; v1(-22.1,-16) -22.1,-12.1 ; v1(-22.1,-4) -22.1,-0.1 ; v1(-22.1,8) -22.1,11.9 ; v1(-22.1,20) -22.1,23.9 ; v1(-10.1,-28) -10.1,-24.1 ; v1(-10.1,-16) -10.1,-12.1 ; v1(-10.1,-4) -10.1,-0.1 ; v1(-10.1,8) -10.1,11.9 ; v1(-10.1,20) -10.1,23.9 ; v1(1.9,-28) 1.9,-24.1 ; v1(1.9,-16) 1.9,-12.1 ; v1(1.9,-4) 1.9,-0.1 ; v1(1.9,8) 1.9,11.9 ; v1(1.9,20) 1.9,23.9 ; v1(13.9,-28) 13.9,-24.1 ; v1(13.9,-16) 13.9,-12.1 ; v1(13.9,-4) 13.9,-0.1 ; v1(13.9,8) 13.9,11.9 ; v1(13.9,20) 13.9,23.9 ; v1(25.9,-28) 25.9,-24.1 ; v1(25.9,-16) 25.9,-12.1 ; v1(25.9,-4) 25.9,-0.1 ; v1(25.9,8) 25.9,11.9 ; v1(25.9,20) 25.9,23.9 ; v1(37.9,-28) 37.9,-24.1 ; v1(37.9,-16) 37.9,-12.1 ; v1(37.9,-4) 37.9,-0.1 ; v1(37.9,8) 37.9,11.9 ; v1(37.9,20) 37.9,23.9 ; v1(49.9,-28) 49.9,-24.1 ; v1(49.9,-16) 49.9,-12.1 ; v1(49.9,-4) 49.9,-0.1 ; v1(49.9,8) 49.9,11.9 ; v1(49.9,20) 49.9,23.9 ; v1(61.9,-28) 61.9,-24.1 ; v1(61.9,-16) 61.9,-12.1 ; v1(61.9,-4) 61.9,-0.1 ; v1(61.9,8) 61.9,11.9 ; v1(61.9,20) 61.9,23.9 ; v1(73.9,-28) 73.9,-24.1 ; v1(73.9,-16) 73.9,-12.1 ; v1(73.9,-4) 73.9,-0.1 ; v1(73.9,8) 73.9,11.9 ; v1(73.9,20) 73.9,23.9 ; v1(85.9,-28) 85.9,-24.1 ; v1(85.9,-16) 85.9,-12.1 ; v1(85.9,-4) 85.9,-0.1 ; v1(85.9,8) 85.9,11.9 ; v1(85.9,20) 85.9,23.9 ; v1(97.9,-28) 97.9,-24.1 ; v1(97.9,-16) 97.9,-12.1 ; v1(97.9,-4) 97.9,-0.1 ; v1(97.9,8) 97.9,11.9 ; v1(97.9,20) 97.9,23.9
  Solder Side w2: -99,-24 -99,22.828 -97.828,24 97.9,24 ; -97.828,-24 97.9,-24 ; -97.828,-12 68,-12 ; -97.828,0 97.9,0 ; -97.828,12 -86,12 ; P1.2 -61.1,17.328 -62.272,18.5 -66.5,18.5 -67,18 -83.1,18 -83.175,17.925 -84.403,17.925 -86.15,16.178 -86.15,13.512 -86.15,12.15 -86,12 ; P2.2 72,-19 68,-15 68,-12 ; 97.9,-12 68,-12 ; 97.9,12 -86,12
GND: C1.1 C2.1 C3.1 C4.1 C5.1 C6.1 C7.1 C8.1 C9.1 C10.1 C11.1 C12.1 C13.1 C14.1 C15.1 C16.1 C17.1 C18.1 C19.1 C20.1 C21.1 C22.1 C23.1 C24.1 C25.1 C26.1 C27.1 C28.1 C29.1 C30.1 C31.1 C32.1 C33.1 C34.1 C35.1 C36.1 C37.1 C38.1 C39.1 C40.1 C41.1 C42.1 C43.1 C44.1 C45.1 C46.1 C47.1 C48.1 C49.1 C50.1 C51.1 C52.1 C53.1 C54.1 C55.1 C56.1 C57.1 C58.1 C59.1 C60.1 C61.1 C62.1 C63.1 C64.1 C65.1 C66.1 C67.1 C68.1 C69.1 C70.1 C71.1 C72.1 C73.1 C74.1 C75.1 C76.1 C77.1 C78.1 C79.1 C80.1 C81.1 C82.1 C83.1 C84.1 C85.1 C86.2 C87.1 LD1.3 LD2.3 LD3.3 LD4.3 LD5.3 LD6.3 LD7.3 LD8.3 LD9.3 LD10.3 LD11.3 LD12.3 LD13.3 LD14.3 LD15.3 LD16.3 LD17.3 LD18.3 LD19.3 LD20.3 LD21.3 LD22.3 LD23.3 LD24.3 LD25.3 LD26.3 LD27.3 LD28.3 LD29.3 LD30.3 LD31.3 LD32.3 LD33.3 LD34.3 LD35.3 LD36.3 LD37.3 LD38.3 LD39.3 LD40.3 LD41.3 LD42.3 LD43.3 LD44.3 LD45.3 LD46.3 LD47.3 LD48.3 LD49.3 LD50.3 LD51.3 LD52.3 LD53.3 LD54.3 LD55.3 LD56.3 LD57.3 LD58.3 LD59.3 LD60.3 LD61.3 LD62.3 LD63.3 LD64.3 LD65.3 LD66.3 LD67.3 LD68.3 LD69.3 LD70.3 LD71.3 LD72.3 LD73.3 LD74.3 LD75.3 LD76.3 LD77.3 LD78.3 LD79.3 LD80.3 LD81.3 LD82.3 LD83.3 LD84.3 LD85.3 P1.3 P2.3 | length 601.8
  Component Side w0.5: LD69.3 -97.143,-22.349 -96.85,-22.642 C69.1 ; LD52.3 -97.143,-10.349 -96.85,-10.642 C52.1 ; LD35.3 -97.143,1.651 -96.85,1.358 C35.1 ; LD18.3 -97.143,13.651 -96.85,13.358 C18.1 ; LD1.3 -97.143,25.651 -96.85,25.358 C1.1 ; LD70.3 -85.143,-22.349 -84.85,-22.642 C70.1 ; LD53.3 -85.143,-10.349 -84.85,-10.642 C53.1 ; LD36.3 -85.143,1.651 -84.85,1.358 C36.1 ; LD19.3 -85.143,13.651 -84.85,13.358 C19.1 ; LD2.3 -85.143,25.651 -84.85,25.358 C2.1 ; LD71.3 -73.143,-22.349 -72.85,-22.642 C71.1 ; LD54.3 -73.143,-10.349 -72.85,-10.642 C54.1 ; LD37.3 -73.143,1.651 -72.85,1.358 C37.1 ; LD20.3 -73.143,13.651 -72.85,13.358 C20.1 ; LD3.3 -73.143,25.651 -72.85,25.358 C3.1 ; LD72.3 -61.143,-22.349 -60.85,-22.642 C72.1 ; LD55.3 -61.143,-10.349 -60.85,-10.642 C55.1 ; LD38.3 -61.143,1.651 -60.85,1.358 C38.1 ; LD21.3 -61.143,13.651 -60.85,13.358 C21.1 ; LD4.3 -61.143,25.651 -60.85,25.358 C4.1 ; LD73.3 -49.143,-22.349 -48.85,-22.642 C73.1 ; LD56.3 -49.143,-10.349 -48.85,-10.642 C56.1 ; LD39.3 -49.143,1.651 -48.85,1.358 C39.1 ; LD22.3 -49.143,13.651 -48.85,13.358 C22.1 ; LD5.3 -49.143,25.651 -48.85,25.358 C5.1 ; LD74.3 -37.143,-22.349 -36.85,-22.642 C74.1 ; LD57.3 -37.143,-10.349 -36.85,-10.642 C57.1 ; LD40.3 -37.143,1.651 -36.85,1.358 C40.1 ; LD23.3 -37.143,13.651 -36.85,13.358 C23.1 ; LD6.3 -37.143,25.651 -36.85,25.358 C6.1 ; LD75.3 -25.143,-22.349 -24.85,-22.642 C75.1 ; LD58.3 -25.143,-10.349 -24.85,-10.642 C58.1 ; LD41.3 -25.143,1.651 -24.85,1.358 C41.1 ; LD24.3 -25.143,13.651 -24.85,13.358 C24.1 ; LD7.3 -25.143,25.651 -24.85,25.358 C7.1 ; LD76.3 -13.143,-22.349 -12.85,-22.642 C76.1 ; LD59.3 -13.143,-10.349 -12.85,-10.642 C59.1 ; LD42.3 -13.143,1.651 -12.85,1.358 C42.1 ; LD25.3 -13.143,13.651 -12.85,13.358 C25.1 ; LD8.3 -13.143,25.651 -12.85,25.358 C8.1 ; LD77.3 -1.143,-22.349 -0.85,-22.642 C77.1 ; LD60.3 -1.143,-10.349 -0.85,-10.642 C60.1 ; LD43.3 -1.143,1.651 -0.85,1.358 C43.1 ; LD26.3 -1.143,13.651 -0.85,13.358 C26.1 ; LD9.3 -1.143,25.651 -0.85,25.358 C9.1 ; LD78.3 10.857,-22.349 11.15,-22.642 C78.1 ; LD61.3 10.857,-10.349 11.15,-10.642 C61.1 ; LD44.3 10.857,1.651 11.15,1.358 C44.1 ; LD27.3 10.857,13.651 11.15,13.358 C27.1 ; LD10.3 10.857,25.651 11.15,25.358 C10.1 ; LD79.3 22.857,-22.349 23.15,-22.642 C79.1 ; LD62.3 22.857,-10.349 23.15,-10.642 C62.1 ; LD45.3 22.857,1.651 23.15,1.358 C45.1 ; LD28.3 22.857,13.651 23.15,13.358 C28.1 ; LD11.3 22.857,25.651 23.15,25.358 C11.1 ; LD80.3 34.857,-22.349 35.15,-22.642 C80.1 ; LD63.3 34.857,-10.349 35.15,-10.642 C63.1 ; LD46.3 34.857,1.651 35.15,1.358 C46.1 ; LD29.3 34.857,13.651 35.15,13.358 C29.1 ; LD12.3 34.857,25.651 35.15,25.358 C12.1 ; LD81.3 46.857,-22.349 47.15,-22.642 C81.1 ; LD64.3 46.857,-10.349 47.15,-10.642 C64.1 ; LD47.3 46.857,1.651 47.15,1.358 C47.1 ; LD30.3 46.857,13.651 47.15,13.358 C30.1 ; LD13.3 46.857,25.651 47.15,25.358 C13.1 ; LD82.3 58.857,-22.349 59.15,-22.642 C82.1 ; LD65.3 58.857,-10.349 59.15,-10.642 C65.1 ; LD48.3 58.857,1.651 59.15,1.358 C48.1 ; LD31.3 58.857,13.651 59.15,13.358 C31.1 ; LD14.3 58.857,25.651 59.15,25.358 C14.1 ; LD83.3 70.857,-22.349 71.15,-22.642 C83.1 ; LD66.3 70.857,-10.349 71.15,-10.642 C66.1 ; LD49.3 70.857,1.651 71.15,1.358 C49.1 ; LD32.3 70.857,13.651 71.15,13.358 C32.1 ; LD15.3 70.857,25.651 71.15,25.358 C15.1 ; LD84.3 82.857,-22.349 83.15,-22.642 C84.1 ; LD67.3 82.857,-10.349 83.15,-10.642 C67.1 ; LD50.3 82.857,1.651 83.15,1.358 C50.1 ; LD33.3 82.857,13.651 83.15,13.358 C33.1 ; LD16.3 82.857,25.651 83.15,25.358 C16.1 ; LD85.3 94.857,-22.349 95.15,-22.642 C85.1 ; LD68.3 94.857,-10.349 95.15,-10.642 C68.1 ; LD51.3 94.857,1.651 95.15,1.358 C51.1 ; LD34.3 94.857,13.651 95.15,13.358 C34.1 ; LD17.3 94.857,25.651 95.15,25.358 C17.1
  other v1: -96.85,-26.9 -84.85,-26.9 -72.85,-26.9 -60.85,-26.9 -48.85,-26.9 -36.85,-26.9 -24.85,-26.9 -12.85,-26.9 -0.85,-26.9 11.15,-26.9 23.15,-26.9 35.15,-26.9 47.15,-26.9 59.15,-26.9 71.15,-26.9 83.15,-26.9 95.15,-26.9 -96.85,-14.9 -84.85,-14.9 -72.85,-14.9 -60.85,-14.9 -48.85,-14.9 -36.85,-14.9 -24.85,-14.9 -12.85,-14.9 -0.85,-14.9 11.15,-14.9 23.15,-14.9 35.15,-14.9 47.15,-14.9 59.15,-14.9 71.15,-14.9 83.15,-14.9 95.15,-14.9 -96.85,-2.9 -84.85,-2.9 -72.85,-2.9 -60.85,-2.9 -48.85,-2.9 -36.85,-2.9 -24.85,-2.9 -12.85,-2.9 -0.85,-2.9 11.15,-2.9 23.15,-2.9 35.15,-2.9 47.15,-2.9 59.15,-2.9 71.15,-2.9 83.15,-2.9 95.15,-2.9 -96.85,9.1 -84.85,9.1 -72.85,9.1 -60.85,9.1 -48.85,9.1 -36.85,9.1 -24.85,9.1 -12.85,9.1 -0.85,9.1 11.15,9.1 23.15,9.1 35.15,9.1 47.15,9.1 59.15,9.1 71.15,9.1 83.15,9.1 95.15,9.1 -81,16 -80,16 -76,16 -75,16 -96.85,21.1 -84.85,21.1 -72.85,21.1 -60.85,21.1 -48.85,21.1 -36.85,21.1 -24.85,21.1 -12.85,21.1 -0.85,21.1 11.15,21.1 23.15,21.1 35.15,21.1 47.15,21.1 59.15,21.1 71.15,21.1 83.15,21.1 95.15,21.1
NEOPIXEL_IN: P1.1 R1.1 | length 38.3
  Component Side w0.254: R1.1 -91.957,27.5 -91.457,27 -73,27 -70,24 -68,24 -63.64,19.64 P1.1
NEOPIXEL_OUT: LD85.2 P2.1 | length 30
  Component Side w0.254: v1(96.5,-22.349) LD85.2
  Solder Side w0.254: P2.1 71.909,-22.349 v1(96.5,-22.349)
NetLD1_2: LD1.2 LD2.4 | length 8.5
  Component Side w0.254: LD1.2 -92.301,25.651 -89,22.35 LD2.4
NetLD1_4: LD1.4 R1.2 | length 9
  Component Side w0.254: LD1.4 -99.6,22.35 -99.8,22.55 -99.8,27 -99.3,27.5 R1.2
NetLD2_2: LD2.2 LD3.4 | length 8.5
  Component Side w0.254: LD2.2 -80.301,25.651 -77,22.35 LD3.4
NetLD3_2: LD3.2 LD4.4 | length 8.5
  Component Side w0.254: LD3.2 -68.301,25.651 -65,22.35 LD4.4
NetLD4_2: LD4.2 LD5.4 | length 8.5
  Component Side w0.254: LD4.2 -56.301,25.651 -53,22.35 LD5.4
NetLD5_2: LD5.2 LD6.4 | length 8.5
  Component Side w0.254: LD5.2 -44.301,25.651 -41,22.35 LD6.4
NetLD6_2: LD6.2 LD7.4 | length 8.5
  Component Side w0.254: LD6.2 -32.301,25.651 -29,22.35 LD7.4
NetLD7_2: LD7.2 LD8.4 | length 8.5
  Component Side w0.254: LD7.2 -20.301,25.651 -17,22.35 LD8.4
NetLD8_2: LD8.2 LD9.4 | length 8.5
  Component Side w0.254: LD8.2 -8.301,25.651 -5,22.35 LD9.4
NetLD9_2: LD9.2 LD10.4 | length 8.5
  Component Side w0.254: LD9.2 3.699,25.651 7,22.35 LD10.4
NetLD10_2: LD10.2 LD11.4 | length 8.5
  Component Side w0.254: LD10.2 15.699,25.651 19,22.35 LD11.4
NetLD11_2: LD11.2 LD12.4 | length 8.5
  Component Side w0.254: LD11.2 27.699,25.651 31,22.35 LD12.4
NetLD12_2: LD12.2 LD13.4 | length 8.5
  Component Side w0.254: LD12.2 39.699,25.651 43,22.35 LD13.4
NetLD13_2: LD13.2 LD14.4 | length 8.5
  Component Side w0.254: LD13.2 51.699,25.651 55,22.35 LD14.4
NetLD14_2: LD14.2 LD15.4 | length 8.5
  Component Side w0.254: LD14.2 63.699,25.651 67,22.35 LD15.4
NetLD15_2: LD15.2 LD16.4 | length 8.5
  Component Side w0.254: LD15.2 75.699,25.651 79,22.35 LD16.4
NetLD16_2: LD16.2 LD17.4 | length 8.5
  Component Side w0.254: LD16.2 87.699,25.651 91,22.35 LD17.4
NetLD17_2: LD17.2 LD18.4 | length 216.8
  Component Side w0.254: LD18.4 -99.67,10.35 -100,10.68 -100,14.5 -99.6,14.9 98.5,14.9 99.851,16.251 99.851,25.502 99.702,25.651 LD17.2
NetLD18_2: LD18.2 LD19.4 | length 8.5
  Component Side w0.254: LD18.2 -92.301,13.651 -89,10.35 LD19.4
NetLD19_2: LD19.2 LD20.4 | length 8.5
  Component Side w0.254: LD19.2 -80.301,13.651 -77,10.35 LD20.4
NetLD20_2: LD20.2 LD21.4 | length 8.5
  Component Side w0.254: LD20.2 -68.301,13.651 -65,10.35 LD21.4
NetLD21_2: LD21.2 LD22.4 | length 8.5
  Component Side w0.254: LD21.2 -56.301,13.651 -53,10.35 LD22.4
NetLD22_2: LD22.2 LD23.4 | length 8.5
  Component Side w0.254: LD22.2 -44.301,13.651 -41,10.35 LD23.4
NetLD23_2: LD23.2 LD24.4 | length 8.5
  Component Side w0.254: LD23.2 -32.301,13.651 -29,10.35 LD24.4
NetLD24_2: LD24.2 LD25.4 | length 8.5
  Component Side w0.254: LD24.2 -20.301,13.651 -17,10.35 LD25.4
NetLD25_2: LD25.2 LD26.4 | length 8.5
  Component Side w0.254: LD25.2 -8.301,13.651 -5,10.35 LD26.4
NetLD26_2: LD26.2 LD27.4 | length 8.5
  Component Side w0.254: LD26.2 3.699,13.651 7,10.35 LD27.4
NetLD27_2: LD27.2 LD28.4 | length 8.5
  Component Side w0.254: LD27.2 15.699,13.651 19,10.35 LD28.4
NetLD28_2: LD28.2 LD29.4 | length 8.5
  Component Side w0.254: LD28.2 27.699,13.651 31,10.35 LD29.4
NetLD29_2: LD29.2 LD30.4 | length 8.5
  Component Side w0.254: LD29.2 39.699,13.651 43,10.35 LD30.4
NetLD30_2: LD30.2 LD31.4 | length 8.5
  Component Side w0.254: LD30.2 51.699,13.651 55,10.35 LD31.4
NetLD31_2: LD31.2 LD32.4 | length 8.5
  Component Side w0.254: LD31.2 63.699,13.651 67,10.35 LD32.4
NetLD32_2: LD32.2 LD33.4 | length 8.5
  Component Side w0.254: LD32.2 75.699,13.651 79,10.35 LD33.4
NetLD33_2: LD33.2 LD34.4 | length 8.5
  Component Side w0.254: LD33.2 87.699,13.651 91,10.35 LD34.4
NetLD34_2: LD34.2 LD35.4 | length 216.8
  Component Side w0.254: LD35.4 -99.67,-1.65 -100,-1.32 -100,2.5 -99.6,2.9 98.5,2.9 99.851,4.251 99.851,13.502 99.702,13.651 LD34.2
NetLD35_2: LD35.2 LD36.4 | length 8.5
  Component Side w0.254: LD35.2 -92.301,1.651 -89,-1.65 LD36.4
NetLD36_2: LD36.2 LD37.4 | length 8.5
  Component Side w0.254: LD36.2 -80.301,1.651 -77,-1.65 LD37.4
NetLD37_2: LD37.2 LD38.4 | length 8.5
  Component Side w0.254: LD37.2 -68.301,1.651 -65,-1.65 LD38.4
NetLD38_2: LD38.2 LD39.4 | length 8.5
  Component Side w0.254: LD38.2 -56.301,1.651 -53,-1.65 LD39.4
NetLD39_2: LD39.2 LD40.4 | length 8.5
  Component Side w0.254: LD39.2 -44.301,1.651 -41,-1.65 LD40.4
NetLD40_2: LD40.2 LD41.4 | length 8.5
  Component Side w0.254: LD40.2 -32.301,1.651 -29,-1.65 LD41.4
NetLD41_2: LD41.2 LD42.4 | length 8.5
  Component Side w0.254: LD41.2 -20.301,1.651 -17,-1.65 LD42.4
NetLD42_2: LD42.2 LD43.4 | length 8.5
  Component Side w0.254: LD42.2 -8.301,1.651 -5,-1.65 LD43.4
NetLD43_2: LD43.2 LD44.4 | length 8.5
  Component Side w0.254: LD43.2 3.699,1.651 7,-1.65 LD44.4
NetLD44_2: LD44.2 LD45.4 | length 8.5
  Component Side w0.254: LD44.2 15.699,1.651 19,-1.65 LD45.4
NetLD45_2: LD45.2 LD46.4 | length 8.5
  Component Side w0.254: LD45.2 27.699,1.651 31,-1.65 LD46.4
NetLD46_2: LD46.2 LD47.4 | length 8.5
  Component Side w0.254: LD46.2 39.699,1.651 43,-1.65 LD47.4
NetLD47_2: LD47.2 LD48.4 | length 8.5
  Component Side w0.254: LD47.2 51.699,1.651 55,-1.65 LD48.4
NetLD48_2: LD48.2 LD49.4 | length 8.5
  Component Side w0.254: LD48.2 63.699,1.651 67,-1.65 LD49.4
NetLD49_2: LD49.2 LD50.4 | length 8.5
  Component Side w0.254: LD49.2 75.699,1.651 79,-1.65 LD50.4
NetLD50_2: LD50.2 LD51.4 | length 8.5
  Component Side w0.254: LD50.2 87.699,1.651 91,-1.65 LD51.4
NetLD51_2: LD51.2 LD52.4 | length 216.8
  Component Side w0.254: LD52.4 -99.67,-13.65 -100,-13.32 -100,-9.5 -99.6,-9.1 98.5,-9.1 99.851,-7.749 99.851,1.502 99.702,1.651 LD51.2
NetLD52_2: LD52.2 LD53.4 | length 8.5
  Component Side w0.254: LD52.2 -92.301,-10.349 -89,-13.65 LD53.4
NetLD53_2: LD53.2 LD54.4 | length 8.5
  Component Side w0.254: LD53.2 -80.301,-10.349 -77,-13.65 LD54.4
NetLD54_2: LD54.2 LD55.4 | length 8.5
  Component Side w0.254: LD54.2 -68.301,-10.349 -65,-13.65 LD55.4
NetLD55_2: LD55.2 LD56.4 | length 8.5
  Component Side w0.254: LD55.2 -56.301,-10.349 -53,-13.65 LD56.4
NetLD56_2: LD56.2 LD57.4 | length 8.5
  Component Side w0.254: LD56.2 -44.301,-10.349 -41,-13.65 LD57.4
NetLD57_2: LD57.2 LD58.4 | length 8.5
  Component Side w0.254: LD57.2 -32.301,-10.349 -29,-13.65 LD58.4
NetLD58_2: LD58.2 LD59.4 | length 8.5
  Component Side w0.254: LD58.2 -20.301,-10.349 -17,-13.65 LD59.4
NetLD59_2: LD59.2 LD60.4 | length 8.5
  Component Side w0.254: LD59.2 -8.301,-10.349 -5,-13.65 LD60.4
NetLD60_2: LD60.2 LD61.4 | length 8.5
  Component Side w0.254: LD60.2 3.699,-10.349 7,-13.65 LD61.4
NetLD61_2: LD61.2 LD62.4 | length 8.5
  Component Side w0.254: LD61.2 15.699,-10.349 19,-13.65 LD62.4
NetLD62_2: LD62.2 LD63.4 | length 8.5
  Component Side w0.254: LD62.2 27.699,-10.349 31,-13.65 LD63.4
NetLD63_2: LD63.2 LD64.4 | length 8.5
  Component Side w0.254: LD63.2 39.699,-10.349 43,-13.65 LD64.4
NetLD64_2: LD64.2 LD65.4 | length 8.5
  Component Side w0.254: LD64.2 51.699,-10.349 55,-13.65 LD65.4
NetLD65_2: LD65.2 LD66.4 | length 8.5
  Component Side w0.254: LD65.2 63.699,-10.349 67,-13.65 LD66.4
NetLD66_2: LD66.2 LD67.4 | length 8.5
  Component Side w0.254: LD66.2 75.699,-10.349 79,-13.65 LD67.4
NetLD67_2: LD67.2 LD68.4 | length 8.5
  Component Side w0.254: LD67.2 87.699,-10.349 91,-13.65 LD68.4
NetLD68_2: LD68.2 LD69.4 | length 216.8
  Component Side w0.254: LD69.4 -99.67,-25.65 -100,-25.32 -100,-21.5 -99.6,-21.1 98.5,-21.1 99.851,-19.749 99.851,-10.498 99.702,-10.349 LD68.2
NetLD69_2: LD69.2 LD70.4 | length 8.5
  Component Side w0.254: LD69.2 -92.301,-22.349 -89,-25.65 LD70.4
NetLD70_2: LD70.2 LD71.4 | length 8.5
  Component Side w0.254: LD70.2 -80.301,-22.349 -77,-25.65 LD71.4
NetLD71_2: LD71.2 LD72.4 | length 8.5
  Component Side w0.254: LD71.2 -68.301,-22.349 -65,-25.65 LD72.4
NetLD72_2: LD72.2 LD73.4 | length 8.5
  Component Side w0.254: LD72.2 -56.301,-22.349 -53,-25.65 LD73.4
NetLD73_2: LD73.2 LD74.4 | length 8.5
  Component Side w0.254: LD73.2 -44.301,-22.349 -41,-25.65 LD74.4
NetLD74_2: LD74.2 LD75.4 | length 8.5
  Component Side w0.254: LD74.2 -32.301,-22.349 -29,-25.65 LD75.4
NetLD75_2: LD75.2 LD76.4 | length 8.5
  Component Side w0.254: LD75.2 -20.301,-22.349 -17,-25.65 LD76.4
NetLD76_2: LD76.2 LD77.4 | length 8.5
  Component Side w0.254: LD76.2 -8.301,-22.349 -5,-25.65 LD77.4
NetLD77_2: LD77.2 LD78.4 | length 8.5
  Component Side w0.254: LD77.2 3.699,-22.349 7,-25.65 LD78.4
NetLD78_2: LD78.2 LD79.4 | length 8.5
  Component Side w0.254: LD78.2 15.699,-22.349 19,-25.65 LD79.4
NetLD79_2: LD79.2 LD80.4 | length 8.5
  Component Side w0.254: LD79.2 27.699,-22.349 31,-25.65 LD80.4
NetLD80_2: LD80.2 LD81.4 | length 8.5
  Component Side w0.254: LD80.2 39.699,-22.349 43,-25.65 LD81.4
NetLD81_2: LD81.2 LD82.4 | length 8.5
  Component Side w0.254: LD81.2 51.699,-22.349 55,-25.65 LD82.4
NetLD82_2: LD82.2 LD83.4 | length 8.5
  Component Side w0.254: LD82.2 63.699,-22.349 67,-25.65 LD83.4
NetLD83_2: LD83.2 LD84.4 | length 8.5
  Component Side w0.254: LD83.2 75.699,-22.349 79,-25.65 LD84.4
NetLD84_2: LD84.2 LD85.4 | length 8.5
  Component Side w0.254: LD84.2 87.699,-22.349 91,-25.65 LD85.4
pads on no net: C1.0 C2.0 C3.0 C4.0 C5.0 C6.0 C7.0 C8.0 C9.0 C10.0 C11.0 C12.0 C13.0 C14.0 C15.0 C16.0 C17.0 C18.0 C19.0 C20.0 C21.0 C22.0 C23.0 C24.0 C25.0 C26.0 C27.0 C28.0 C29.0 C30.0 C31.0 C32.0 C33.0 C34.0 C35.0 C36.0 C37.0 C38.0 C39.0 C40.0 C41.0 C42.0 C43.0 C44.0 C45.0 C46.0 C47.0 C48.0 C49.0 C50.0 C51.0 C52.0 C53.0 C54.0 C55.0 C56.0 C57.0 C58.0 C59.0 C60.0 C61.0 C62.0 C63.0 C64.0 C65.0 C66.0 C67.0 C68.0 C69.0 C70.0 C71.0 C72.0 C73.0 C74.0 C75.0 C76.0 C77.0 C78.0 C79.0 C80.0 C81.0 C82.0 C83.0 C84.0 C85.0 C87.0 MH1.M3 MH2.M3 MH3.M3 MH4.M3 MH5.M3 MH6.M3 MH7.M3 MH8.M3 MH9.M3 MH10.M3 MH11.M3 MH12.M3 R1.0

## Polygon pours and split planes (outlines as drawn)
GND on Component Side "GND_L01_P000" (solid, pour order 0): 101,29 101,-29 -101,-29 -101,29
GND on Solder Side "GND_L02_P001" (solid, pour order 1): 101,29 101,-29 -101,-29 -101,29

## Silkscreen, mask and mechanical layers (free items; w line width, h text height)
Bottom Overlay:
  rectangle: 3.5,-8.5 8.5,-3.5
  rectangle: -8.5,-8.5 -3.5,-3.5
  rectangle: 3.5,3.5 8.5,8.5
  rectangle: -8.5,3.5 -3.5,8.5
  rectangle: 31.5,-2.5 36.5,2.5
  rectangle: 31.5,9.5 36.5,14.5
  rectangle: -48.5,-14.5 -43.5,-9.5
  rectangle: -42.5,-14.5 -37.5,-9.5
  rectangle: -36.5,-14.5 -31.5,-9.5
  rectangle: -36.5,-8.5 -31.5,-3.5
  rectangle: -36.5,-2.5 -31.5,2.5
  rectangle: -36.5,3.5 -31.5,8.5
  rectangle: -36.5,9.5 -31.5,14.5
  rectangle: -28.5,-14.5 -23.5,-9.5
  rectangle: -22.5,-14.5 -17.5,-9.5
  rectangle: -22.5,-2.5 -17.5,2.5
  rectangle: -28.5,9.5 -23.5,14.5
  rectangle: -22.5,9.5 -17.5,14.5
  rectangle: -16.5,-14.5 -11.5,-9.5
  rectangle: -16.5,-8.5 -11.5,-3.5
  rectangle: -16.5,-2.5 -11.5,2.5
  rectangle: -16.5,3.5 -11.5,8.5
  rectangle: -16.5,9.5 -11.5,14.5
  rectangle: -8.5,9.5 -3.5,14.5
  rectangle: 3.5,-14.5 8.5,-9.5
  rectangle: -8.5,-14.5 -3.5,-9.5
  rectangle: -2.5,-2.5 2.5,2.5
  rectangle: 3.5,9.5 8.5,14.5
  rectangle: 11.5,-14.5 16.5,-9.5
  rectangle: 23.5,-14.5 28.5,-9.5
  rectangle: 17.5,-14.5 22.5,-9.5
  rectangle: 17.5,-8.5 22.5,-3.5
  rectangle: 17.5,-2.5 22.5,2.5
  rectangle: 17.5,3.5 22.5,8.5
  rectangle: 11.5,9.5 16.5,14.5
  rectangle: 17.5,9.5 22.5,14.5
  rectangle: 23.5,9.5 28.5,14.5
  rectangle: 37.5,-2.5 42.5,2.5
  rectangle: 31.5,3.5 36.5,8.5
  rectangle: 43.5,-14.5 48.5,-9.5
  rectangle: 43.5,-8.5 48.5,-3.5
  rectangle: 37.5,9.5 42.5,14.5
  rectangle: 43.5,-2.5 48.5,2.5
  rectangle: 43.5,3.5 48.5,8.5
  rectangle: 43.5,9.5 48.5,14.5
  text "D" at -62.974,17.8 h2
  text "+" at -60.434,17.467 h2
  text "-" at -57.894,17.3 h2
  text "IN" at -65.8,15.2 h2
  text "D" at 70.126,-18.2 h2
  text "+" at 72.666,-18.533 h2
  text "-" at 75.206,-18.7 h2
  text "OUT" at 67.3,-20.8 h2
  text "v1.0A" at 100.3,-28.3 h2
Mechanical 1:
  lines w0.254: -101,24 -91,24 ; -96,19 -96,29 ; -5,0 5,0 ; 0,-5 0,5
Mechanical 4:
  lines w0.254: -101,-29 -101,29 101,29 101,-29 -101,-29 ; 30,-9 40,-9 40,1 30,1 30,-9
Top 3D Body:
  lines w2: -102,-18 102,-18 ; -102,-6 102,-6 ; -102,6 102,6 ; -102,18 102,18 ; -90,-30 -90,30 ; -78,-30 -78,30 ; -66,-30 -66,30 ; -54,-30 -54,30 ; -42,-30 -42,30 ; -30,-30 -30,30 ; -18,-30 -18,30 ; -6,-30 -6,30 ; 6,-30 6,30 ; 18,-30 18,30 ; 30,-30 30,30 ; 42,-30 42,30 ; 54,-30 54,30 ; 66,-30 66,30 ; 78,-30 78,30 ; 90,-30 90,30